# Altium PCB pcb-v2-corrected-unrouted.PcbDoc
Units mm, origin at the board's own origin, x right, y up, seen from the top; angles counter-clockwise.
Board outline 19.6 x 17.6 mm, 2 copper layers (F.Cu, B.Cu); 1 components, 9 nets, 95 pads, 0 vias.
Unrouted connection lines stored in the file: 57.
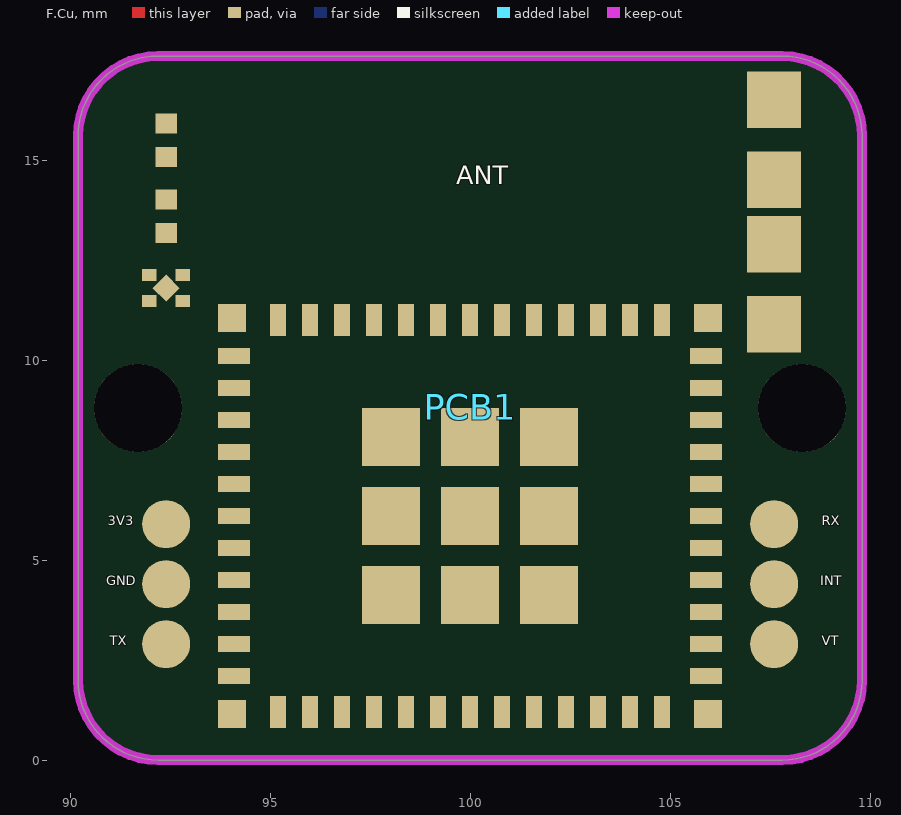
[diagram p0: F.Cu view]
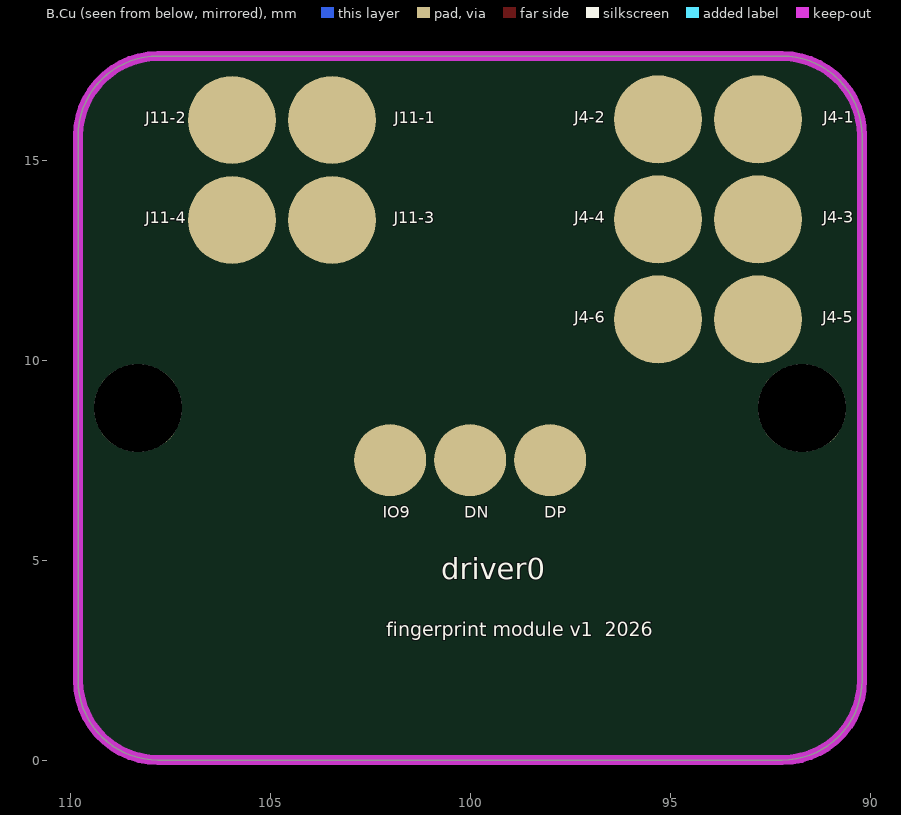
[diagram p1: B.Cu view, seen from below]

## Layer stack, top to bottom
F.Mask: solder mask 0.0102, Solder Resist, Dk 3.5
F.Cu: signal copper 0.0356
Dielectric 1: dielectric 0.32, FR-4, Dk 4.8
B.Cu: signal copper 0.0356
B.Mask: solder mask 0.0102, Solder Resist, Dk 3.5

## Board outline
92.2,17.6 107.8,17.6 cw(c107.799,15.599) 109.8,15.6 109.8,2 cw(c107.799,2.001) 107.8,0 92.2,0 cw(c92.201,2.001) 90.2,2 90.2,15.6 cw(c92.201,15.599) 92.2,17.6

## Design rules (kind name [scope] priority, off if disabled: settings)
Clearance "Clearence 0.2_NetClass" [InNetClass('Default')] p1: gap=0.2 ignorepadtopadclearanceinfootprint=FALSE
MinimumSolderMaskSliver [All] p1: minsoldermaskwidth=0
PolygonConnect [All] p1: connectstyle=Direct reliefconductorwidth=0.254 reliefentries=4 polygonreliefangle="90 Angle" airgapwidth=0.254
RoutingVias [All] p1: holewidth=0.711 width=1.27 viastyle="Through Hole" minholewidth=0.711 minwidth=1.27 maxholewidth=0.711 maxwidth=1.27
SilkToSilkClearance [All] p1: silktosilkclearance=0
SilkToSolderMaskClearance [IsPad] p1: minsilkscreentomaskgap=0 clearancetoexposedcopper=TRUE
SolderMaskExpansion [All] p1: expansion=0 istentingtop=FALSE
Width [All] p1: maxlimit=0.254 minlimit=0.254 preferedwidth=0.254
27 further rules are at their usual default settings.

## Classes and differential pairs
net class Default: +3V3 BOOT_IO9 FP_INT FP_RX FP_TX GND USB_DN USB_DP VBAT

## Components (designator, comment, footprint, x,y, rotation, side; value= is the part's Value field where it differs from the comment)
PCB1 "Comment" touchid_board 100,8.8 r0 top value=touchid_v1

## Footprints (in the part's own frame and the unit in brackets; to place one, negate y for a bottom-side part, rotate by r counter-clockwise, add the part's x,y. Pads: shape width x height; smd on the part's side, far side on the other; paste and mask are expansions set on the pad)
touchid_board [mm]
  rect 0.54x0.5 smd mask+0: C1-1(-7.6,5.22) C1-2(-7.6,4.38) C2-1(-7.6,7.12) C2-2(-7.6,6.28)
  rect 1.35x1.41 smd mask+0: C3-1(7.6,4.1) C3-2(7.6,2.1) C4-1(7.6,7.71) C4-2(7.6,5.71)
  round 1.2 smd mask+0: J2-1(-7.6,-2.9) J2-2(-7.6,-4.4) J2-3(-7.6,-5.9) J2-4(7.6,-2.9) J2-5(7.6,-4.4) J2-6(7.6,-5.9)
  round 2.2 smd far side paste-2.2 mask+0: J4-1(-7.2,7.22) J4-2(-4.7,7.22) J4-3(-7.2,4.72) J4-4(-4.7,4.72) J4-5(-7.2,2.22) J4-6(-4.7,2.22) J11-1(3.45,7.2) J11-2(5.95,7.2) J11-3(3.45,4.7) J11-4(5.95,4.7)
  round 1.8 smd far side paste-1.8 mask+0: TP-DN(0,-1.3) TP-DP(-2,-1.3) TP-IO9(2,-1.3)
  rect 0.8x0.4 smd mask+0: U1-1(-5.9,1.3) U1-2(-5.9,0.5) U1-3(-5.9,-0.3) U1-4(-5.9,-1.1) U1-5(-5.9,-1.9) U1-6(-5.9,-2.7) U1-7(-5.9,-3.5) U1-8(-5.9,-4.3) U1-9(-5.9,-5.1) U1-10(-5.9,-5.9) U1-11(-5.9,-6.7) U1-25(5.9,-6.7) U1-26(5.9,-5.9) U1-27(5.9,-5.1) U1-28(5.9,-4.3) U1-29(5.9,-3.5) U1-30(5.9,-2.7) U1-31(5.9,-1.9) U1-32(5.9,-1.1) U1-33(5.9,-0.3) U1-34(5.9,0.5) U1-35(5.9,1.3)
  rect 0.4x0.8 smd mask+0: U1-12(-4.8,-7.6) U1-13(-4,-7.6) U1-14(-3.2,-7.6) U1-15(-2.4,-7.6) U1-16(-1.6,-7.6) U1-17(-0.8,-7.6) U1-18(0,-7.6) U1-19(0.8,-7.6) U1-20(1.6,-7.6) U1-21(2.4,-7.6) U1-22(3.2,-7.6) U1-23(4,-7.6) U1-24(4.8,-7.6) U1-36(4.8,2.2) U1-37(4,2.2) U1-38(3.2,2.2) U1-39(2.4,2.2) U1-40(1.6,2.2) U1-41(0.8,2.2) U1-42(0,2.2) U1-43(-0.8,2.2) U1-44(-1.6,2.2) U1-45(-2.4,2.2) U1-46(-3.2,2.2) U1-47(-4,2.2) U1-48(-4.8,2.2)
  rect 1.45x1.45 smd mask+0: U1-49_1(-1.975,-0.725) U1-49_2(0,-0.725) U1-49_3(1.975,-0.725) U1-49_4(-1.975,-2.7) U1-49_5(0,-2.7) U1-49_6(1.975,-2.7) U1-49_7(-1.975,-4.675) U1-49_8(0,-4.675) U1-49_9(1.975,-4.675)
  rect 0.7x0.7 smd mask+0: U1-50(5.95,2.25) U1-51(5.95,-7.65) U1-52(-5.95,-7.65) U1-53(-5.95,2.25)
  rect 0.36x0.3 smd mask-0.05: U2-1(-8.021,3.325) U2-2(-8.021,2.675) U2-3(-7.179,2.675) U2-4(-7.179,3.325)
  rect 0.48x0.48 smd rot 45 mask-0.05: U2-5(-7.6,3)
  round 2.2 hole 2.2 paste-2539.97 mask+0: Un1(8.3,0) Un2(-8.3,0)

## Part data
PCB1: library part touchid_board, "TouchID module board: F.Cu=components (cavity side), B.Cu=pogo pads (module bottom). Nets: VBAT from J11-1/2/3, GND J4-5, 3V3 via U2 LDO. Ratsnest shows required connections - routing TBD."

## Nets (pads, with @x,y where several pads share a name; then routed paths per layer and width w, separated by ;. In a path a pad name is that pad's centre, name@x,y a point inside that pad or via, vN(x,y) a via of type N, cw(c..) or ccw(c..) an arc to the next point about the centre after c; other vN are vias at no path point)
+3V3: PCB1.C1-1 PCB1.J2-1 PCB1.J2-6 PCB1.U1-3 PCB1.U1-5 PCB1.U1-8 PCB1.U1-22 PCB1.U2-1
BOOT_IO9: PCB1.TP-IO9 PCB1.U1-23
FP_INT: PCB1.J2-5 PCB1.U1-6
FP_RX: PCB1.J2-4 PCB1.U1-31
FP_TX: PCB1.J2-3 PCB1.U1-30
GND: PCB1.C1-2 PCB1.C2-2 PCB1.C3-2 PCB1.C4-2 PCB1.J2-2 PCB1.J4-5 PCB1.U1-1 PCB1.U1-2 PCB1.U1-11 PCB1.U1-14 PCB1.U1-36 PCB1.U1-37 PCB1.U1-38 PCB1.U1-39 PCB1.U1-40 PCB1.U1-41 PCB1.U1-42 PCB1.U1-43 PCB1.U1-44 PCB1.U1-45 PCB1.U1-46 PCB1.U1-47 PCB1.U1-48 PCB1.U1-49_1 PCB1.U1-49_2 PCB1.U1-49_3 PCB1.U1-49_4 PCB1.U1-49_5 PCB1.U1-49_6 PCB1.U1-49_7 PCB1.U1-49_8 PCB1.U1-49_9 PCB1.U1-50 PCB1.U1-51 PCB1.U1-52 PCB1.U1-53 PCB1.U2-2 PCB1.U2-5
USB_DN: PCB1.TP-DN PCB1.U1-26
USB_DP: PCB1.TP-DP PCB1.U1-27
VBAT: PCB1.C2-1 PCB1.C3-1 PCB1.C4-1 PCB1.J11-1 PCB1.J11-2 PCB1.J11-3 PCB1.U2-3 PCB1.U2-4
pads on no net: PCB1.J4-1 PCB1.J4-2 PCB1.J4-3 PCB1.J4-4 PCB1.J4-6 PCB1.J11-4 PCB1.U1-4 PCB1.U1-7 PCB1.U1-9 PCB1.U1-10 PCB1.U1-12 PCB1.U1-13 PCB1.U1-15 PCB1.U1-16 PCB1.U1-17 PCB1.U1-18 PCB1.U1-19 PCB1.U1-20 PCB1.U1-21 PCB1.U1-24 PCB1.U1-25 PCB1.U1-28 PCB1.U1-29 PCB1.U1-32 PCB1.U1-33 PCB1.U1-34 PCB1.U1-35 PCB1.Un1 PCB1.Un2

## Keep-outs
Edge.Cuts:
  lines w0: 90.2,2 ccw(c92.201,2.001) 92.2,0 107.8,0 ccw(c107.799,2.001) 109.8,2 109.8,15.6 ccw(c107.799,15.599) 107.8,17.6 92.2,17.6 ccw(c92.201,15.599) 90.2,15.6 90.2,2
  lines w0.254: 90.2,2 ccw(c92.201,2.001) 92.2,0 107.8,0 ccw(c107.799,2.001) 109.8,2 109.8,15.6 ccw(c107.799,15.599) 107.8,17.6 92.2,17.6 ccw(c92.201,15.599) 90.2,15.6 90.2,2

## Text inside footprints (layer, text, board x,y; h text height)
PCB1: B.SilkS "fingerprint module v1  2026" at 102.096,2.971 h0.6; B.SilkS "driver0" at 100.725,4.343 h0.9; B.SilkS "IO9" at 102.186,5.958 h0.5; B.SilkS "DN" at 100.149,5.961 h0.5; B.SilkS "DP" at 98.149,5.961 h0.5; B.SilkS "J11-3" at 101.913,13.318 h0.5; B.SilkS "J11-4" at 108.119,13.318 h0.5; B.SilkS "J11-1" at 101.898,15.82 h0.5; B.SilkS "J11-2" at 108.116,15.818 h0.5; B.SilkS "J4-5" at 91.19,10.838 h0.5; B.SilkS "J4-6" at 97.394,10.838 h0.5; B.SilkS "J4-3" at 91.187,13.338 h0.5; B.SilkS "J4-4" at 97.393,13.338 h0.5; B.SilkS "J4-1" at 91.173,15.838 h0.5; B.SilkS "J4-2" at 97.391,15.838 h0.5; F.Fab "J2 sensor wires" at 91.769,1.336 h0.45; F.Fab "VT" at 105.998,2.787 h0.4; F.Fab "INT" at 105.957,4.289 h0.4; F.Fab "RX" at 105.992,5.789 h0.4; F.Fab "TX" at 93.792,2.789 h0.4; F.Fab "GND" at 93.704,4.286 h0.4; F.Fab "3V3" at 93.744,5.786 h0.4; F.Fab "C4" at 105.883,15.382 h0.45; F.Fab "C3" at 105.888,11.771 h0.45; F.Fab "C2" at 93.598,15.386 h0.4; F.Fab "C1" at 93.613,13.486 h0.4; F.Fab "U2 TPS7A20" at 93.659,11.671 h0.45; F.Fab "U1 ESP32-C3-MINI-1-N4" at 97.741,5.872 h0.8; F.SilkS "VT" at 108.798,2.787 h0.4; F.SilkS "INT" at 108.757,4.289 h0.4; F.SilkS "RX" at 108.792,5.789 h0.4; F.SilkS "TX" at 90.992,2.789 h0.4; F.SilkS "GND" at 90.904,4.286 h0.4; F.SilkS "3V3" at 90.944,5.786 h0.4; F.SilkS "ANT" at 99.648,14.228 h0.8